# Altium PCB ButtonsBrightnessPCB.PcbDoc
Units mil, origin at the board's own origin, x right, y up, seen from the top; angles counter-clockwise.
Board outline 2515 x 3270 mil, 2 copper layers (Top Layer, Bottom Layer); 50 components, 47 nets, 184 pads, 0 vias.
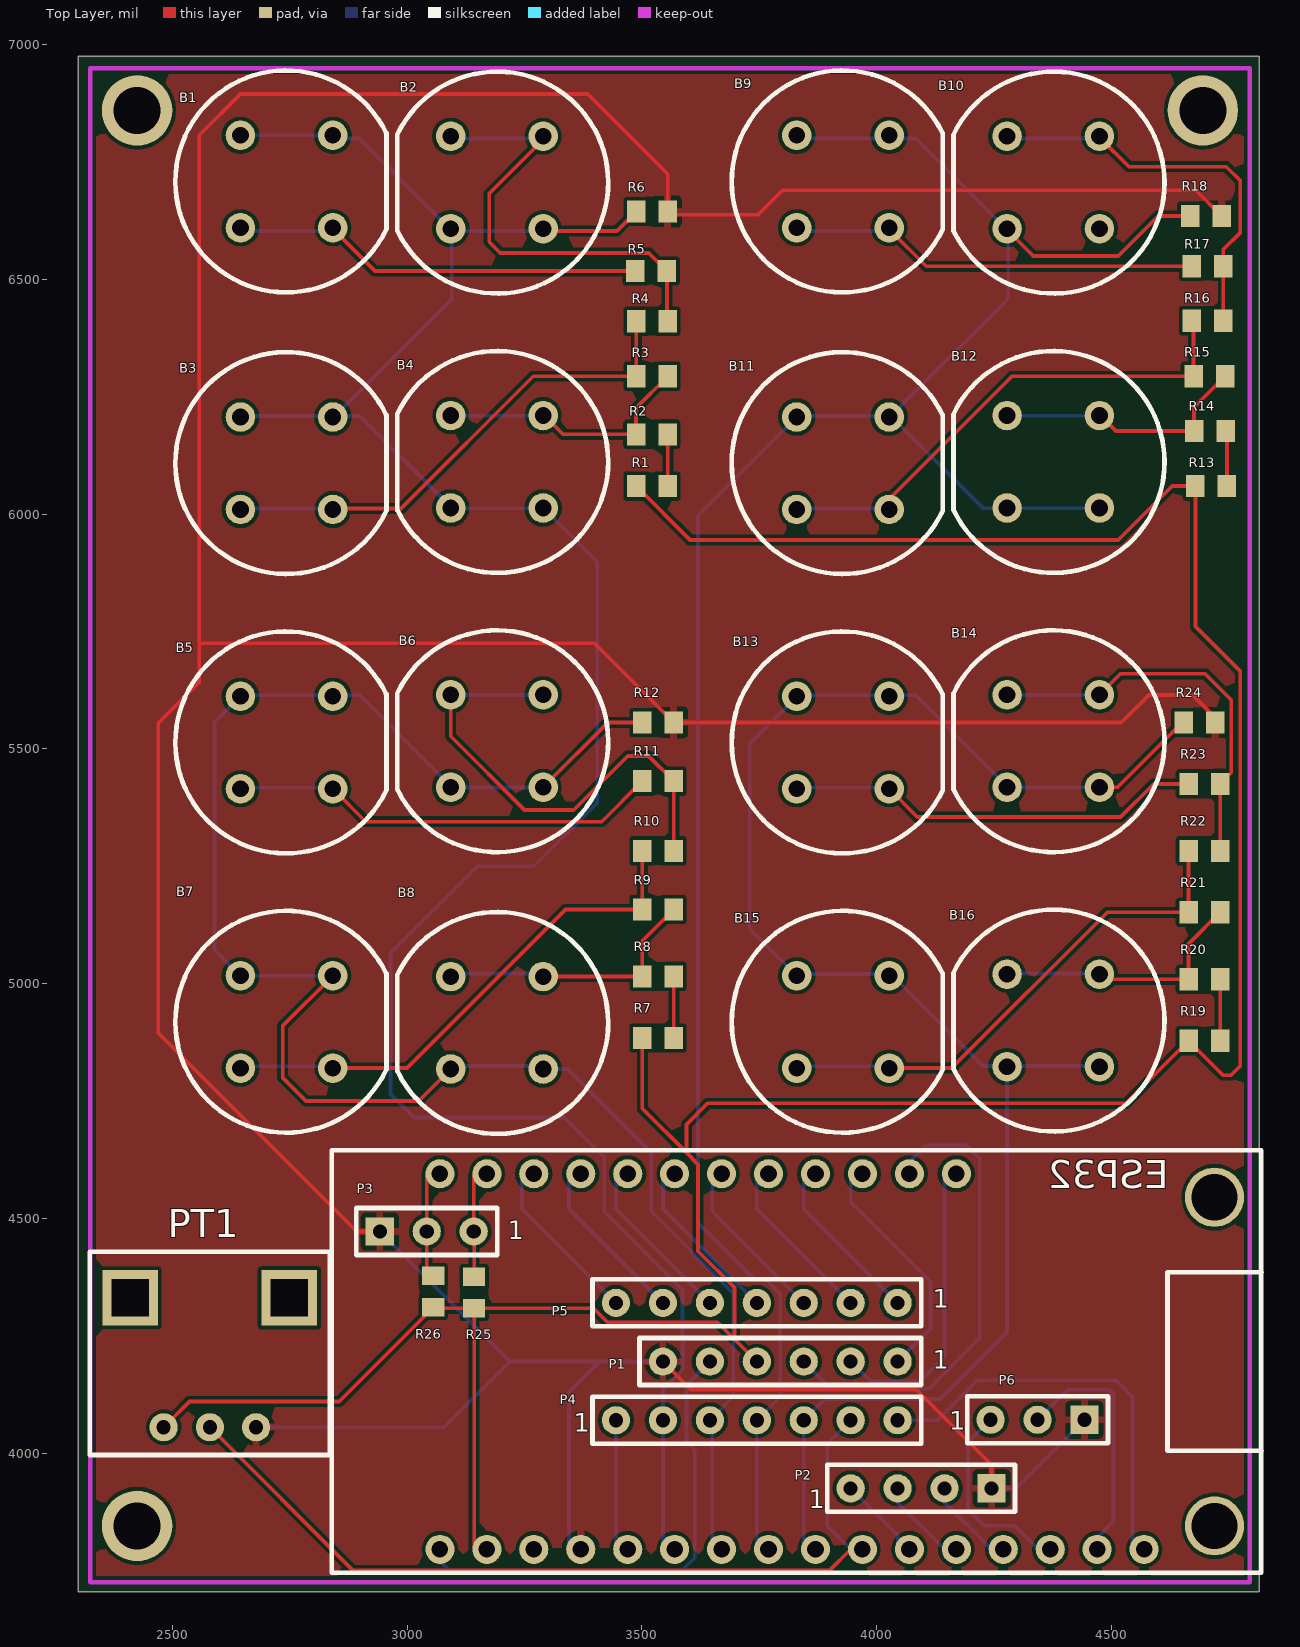
[diagram p0: Top Layer view]
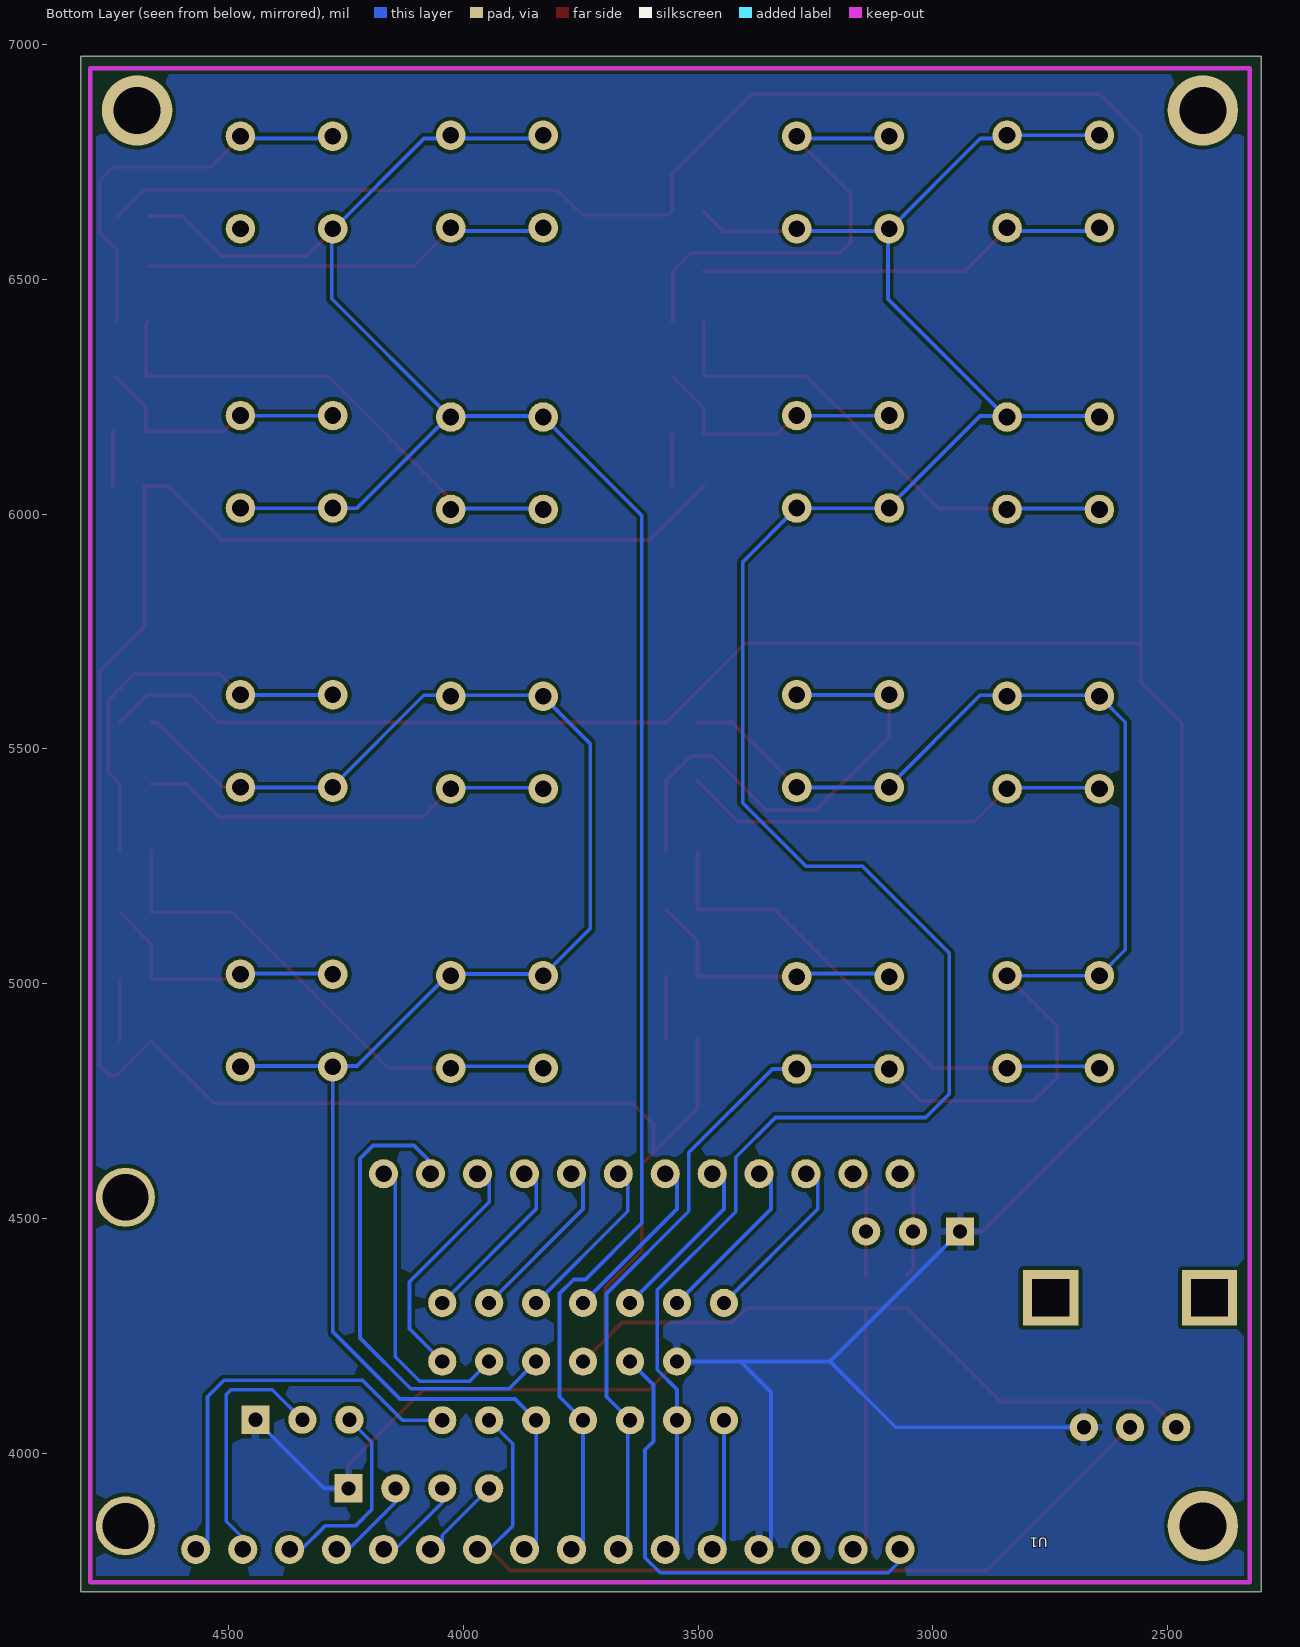
[diagram p1: Bottom Layer view, seen from below]

## Layer stack, top to bottom
Top Solder: solder mask 0.4, Solder Resist, Dk 3.5
Top Layer: signal copper 1.4
Dielectric 1: dielectric 12.6, FR-4, Dk 4.8
Bottom Layer: signal copper 1.4
Bottom Solder: solder mask 0.4, Solder Resist, Dk 3.5

## Board outline
2300,3705 4815,3705 4815,6975 2300,6975

## Design rules (kind name [scope] priority, off if disabled: settings)
Clearance [All] p1: gap=8 ignorepadtopadclearanceinfootprint=FALSE
PolygonConnect PolygonConnect_5 [All vs IsNamedPolygon('Bottom Layer-No Net')] p1: connectstyle=Relief reliefconductorwidth=15 reliefentries=4 polygonreliefangle="90 Angle" airgapwidth=10
PolygonConnect PolygonConnect_4 [All vs IsNamedPolygon('Top Layer-No Net')] p2: connectstyle=Relief reliefconductorwidth=15 reliefentries=4 polygonreliefangle="90 Angle" airgapwidth=10
PolygonConnect PolygonConnect_3 [All vs IsNamedPolygon('Bottom Layer-No Net')] p3: connectstyle=Direct reliefconductorwidth=10 reliefentries=4 polygonreliefangle="90 Angle" airgapwidth=10
PolygonConnect PolygonConnect_2 [All vs IsNamedPolygon('Top Layer-No Net')] p4: connectstyle=Direct reliefconductorwidth=10 reliefentries=4 polygonreliefangle="90 Angle" airgapwidth=10
PolygonConnect PolygonConnect_1 [All vs IsNamedPolygon('Bottom Layer-No Net')] p5: thpad.connectstyle=Direct thpad.reliefconductorwidth=10 thpad.reliefentries=4 thpad.polygonreliefangle="90 Angle" thpad.airgapwidth=10 smdpad.connectstyle=Direct smdpad.reliefconductorwidth=10 smdpad.reliefentries=4 smdpad.polygonreliefangle="90 Angle" smdpad.airgapwidth=10 via.connectstyle=Relief via.reliefconductorwidth=10 via.reliefentries=4 via.polygonreliefangle="90 Angle" via.airgapwidth=10
PolygonConnect [All] p6: connectstyle=Relief reliefconductorwidth=10 reliefentries=4 polygonreliefangle="90 Angle" airgapwidth=10
RoutingVias [All] p1: holewidth=25 width=40 viastyle="Through Hole" minholewidth=28 minwidth=50 maxholewidth=28 maxwidth=50
SolderMaskExpansion [All] p1: expansion=4
Width [All] p1: maxlimit=8 minlimit=8 preferedwidth=8
30 further rules are at their usual default settings.

## Components (designator, comment, footprint, x,y, rotation, side; value= is the part's Value field where it differs from the comment)
B1 "Button_D6R90" BUTTON_D6R90 2840,6610 r180 top
B2 "Button_D6R90" BUTTON_D6R90 3095,6805 r0 top
B3 "Button_D6R90" BUTTON_D6R90 2840,6010 r180 top
B4 "Button_D6R90" BUTTON_D6R90 3095,6210 r0 top
B5 "Button_D6R90" BUTTON_D6R90 2840,5415 r180 top
B6 "Button_D6R90" BUTTON_D6R90 3095,5615 r0 top
B7 "Button_D6R90" BUTTON_D6R90 2840,4820 r180 top
B8 "Button_D6R90" BUTTON_D6R90 3095,5015 r0 top
B9 "Button_D6R90" BUTTON_D6R90 4025,6610 r180 top
B10 "Button_D6R90" BUTTON_D6R90 4280,6805 r0 top
B11 "Button_D6R90" BUTTON_D6R90 4024.88,6010 r180 top
B12 "Button_D6R90" BUTTON_D6R90 4280,6210 r0 top
B13 "Button_D6R90" BUTTON_D6R90 4025,5415 r180 top
B14 "Button_D6R90" BUTTON_D6R90 4280,5615 r0 top
B15 "Button_D6R90" BUTTON_D6R90 4025,4820 r180 top
B16 "Button_D6R90" BUTTON_D6R90 4280,5020 r0 top
P1 "Header 6" CONN_6 4045,4195 r180 top
P2 "Header 4" CONN_4 3945,3925 r0 top
P3 "Header 3" CONN_3 3142,4472 r180 top
P4 "Header 7" CONN_7 3445,4070 r0 top
P5 "Header 7" CONN_7 4045,4320 r180 top
P6 "Header 3" CONN_3 4243,4071 r0 top
PT1 "P090S_pot" P090S_pot 2481.57,4055 r0 top
R1 "ERJ-6GEYJ471V" RES_0804_PANASONIC 3521.81,6056.81 r180 top
R2 "ERJ-6GEYJ471V" RES_0804_PANASONIC 3521.43,6172.95 r0 top
R3 "ERJ-6GEYJ471V" RES_0804_PANASONIC 3521.81,6290.78 r180 top
R4 "ERJ-6GEYJ471V" RES_0804_PANASONIC 3521.81,6413.67 r0 top
R5 "ERJ-6GEYJ471V" RES_0804_PANASONIC 3520,6515 r180 top
R6 "ERJ-6GEYJ471V" RES_0804_PANASONIC 3521.81,6647.64 r0 top
R7 "ERJ-6GEYJ471V" RES_0804_PANASONIC 3534.69,4881.22 r180 top
R8 "ERJ-6GEYJ471V" RES_0804_PANASONIC 3534.69,5018.01 r0 top
R9 "ERJ-6GEYJ471V" RES_0804_PANASONIC 3534.69,5154.8 r180 top
R10 "ERJ-6GEYJ471V" RES_0804_PANASONIC 3534.69,5285.68 r0 top
R11 "ERJ-6GEYJ471V" RES_0804_PANASONIC 3534.69,5428.38 r180 top
R12 "ERJ-6GEYJ471V" RES_0804_PANASONIC 3534.69,5559.26 r0 top
R13 "ERJ-6GEYJ471V" RES_0804_PANASONIC 4712.84,6056.81 r180 top
R14 "ERJ-6GEYJ471V" RES_0804_PANASONIC 4710,6180 r0 top
R15 "ERJ-6GEYJ471V" RES_0804_PANASONIC 4708.91,6290.78 r180 top
R16 "ERJ-6GEYJ471V" RES_0804_PANASONIC 4705,6415 r0 top
R17 "ERJ-6GEYJ471V" RES_0804_PANASONIC 4705,6525 r180 top
R18 "ERJ-6GEYJ471V" RES_0804_PANASONIC 4701.43,6637.95 r0 top
R19 "ERJ-6GEYJ471V" RES_0804_PANASONIC 4698.35,4875.31 r180 top
R20 "ERJ-6GEYJ471V" RES_0804_PANASONIC 4698.35,5012.1 r0 top
R21 "ERJ-6GEYJ471V" RES_0804_PANASONIC 4698.35,5148.89 r180 top
R22 "ERJ-6GEYJ471V" RES_0804_PANASONIC 4698.35,5285.68 r0 top
R23 "ERJ-6GEYJ471V" RES_0804_PANASONIC 4698.35,5422.47 r180 top
R24 "ERJ-6GEYJ471V" RES_0804_PANASONIC 4688.35,5559.26 r0 top
R25 "ERJ-6GEYJ471V" RES_0804_PANASONIC 3140,4342 r90 top
R26 "ERJ-6GEYJ471V" RES_0804_PANASONIC 3053,4344 r90 top
U1 "ESP32_feather" ESP32_FEATHER 4170,4595 r180 bottom

## Footprints (in the part's own frame and the unit in brackets; to place one, negate y for a bottom-side part, rotate by r counter-clockwise, add the part's x,y. Pads: shape width x height; smd on the part's side, far side on the other; paste and mask are expansions set on the pad)
BUTTON_D6R90 [mm]
  round 1.6 hole 0.9: 1(-0.05,0) 2(4.95,0) 3(-0.05,-5) 4(4.95,-5)
  silkscreen extent -2.95,-8.51 8.47,3.49
CONN_3 [mil]
  round 60 hole 30: 1(0,0) 2(100,0)
  rect 60x60 hole 30: 3(200,0)
  silkscreen extent -50,-50 250,50
CONN_4 [mil]
  round 60 hole 30: 1(0,0) 2(100,0) 3(200,0)
  rect 60x60 hole 30: 4(300,0)
  silkscreen extent -50,-50 350,50
CONN_6 [mil]
  round 60 hole 30: 1(0,0) 2(100,0) 3(200,0) 4(300,0) 5(400,0) 6(500,0)
  silkscreen extent -50,-50 550,50
CONN_7 [mil]
  round 60 hole 30: 1(0,0) 2(100,0) 3(200,0) 4(300,0) 5(400,0) 6(500,0) 7(600,0)
  silkscreen extent -50,-50 650,50
ESP32_FEATHER [mil]
  round 62 hole 35.43: 1(0,0) 2(100,0) 3(200,0) 4(300,0) 5(400,0) 6(500,0) 7(600,0) 8(700,0) 9(800,0) 10(900,0) 11(1000,0) 12(1100,0) 13(1100,-800) 14(1000,-800) 15(900,-800) 16(800,-800) 17(700,-800) 18(600,-800) 19(500,-800) 20(400,-800) 21(300,-800) 22(200,-800) 23(100,-800) 24(0,-800) 25(-100,-800) 26(-200,-800) 27(-300,-800) 28(-400,-800)
  round 125.98 hole 98.43: S1(-550,-50) S2(-550,-750)
P090S_pot [mm]
  round 1.524 hole 0.762: 1(0,0) 2(2.5,0) 3(5,0)
  rect 3x3 hole 2 square: 4(-1.8,7) 4(6.8,7)
  silkscreen extent -4,-1.5 9,9.5
RES_0804_PANASONIC [mm]
  rect 1.006x1.2 smd: 1(-0.853,-0.075) 2(0.853,-0.075)

## Part data
P1: "Header, 6-Pin", LatestRevisionDate=17-Jul-2002, LatestRevisionNote="Re-released for DXP Platform.", Publisher="Altium Limited"
P2: "Header, 4-Pin", LatestRevisionDate=17-Jul-2002, LatestRevisionNote="Re-released for DXP Platform.", Publisher="Altium Limited"
P3 P6: "Header, 3-Pin", LatestRevisionDate=17-Jul-2002, LatestRevisionNote="Re-released for DXP Platform.", Publisher="Altium Limited"
P4 P5: "Header, 7-Pin", LatestRevisionDate=17-Jul-2002, LatestRevisionNote="Re-released for DXP Platform.", Publisher="Altium Limited"
R1 R2 R3 R4 R5 R6 R7 R8 R9 R10 R11 R12 R13 R14 R15 R16 R17 R18 R19 R20 R21 R22 R23 R24 R25 R26: Built_By=EMA_UL_Team, C="Copyright (C) 2015 Accelerated Designs. All rights reserved", Manufacturer_Part_Number=ERJ-6GEYJ471V, Vendor=Panasonic

## Free pads (board coordinates)
  round 150 hole 100: 8(2425,3845) 8(2425,6860) 9(4695,6860)

## Nets (pads, with @x,y where several pads share a name; then routed paths per layer and width w, separated by ;. In a path a pad name is that pad's centre, name@x,y a point inside that pad or via, vN(x,y) a via of type N, cw(c..) or ccw(c..) an arc to the next point about the centre after c; other vN are vias at no path point)
3.3V: P1.4 PT1.1 R1.2 R7.2 R13.2 R19.2 R25.1 R26.1 U1.14 | length 6567.2
  Top Layer w8: PT1.1 2536.57,4110 2855.53,4110 R26.1 3057.95,4308.43 R25.1 ; U1.14@3145,3795 3142.95,3797.05 R25.1 ; R1.2 3603,5945 4515,5945 4629.76,6059.76 R13.2 4679.27,5760.73 4775,5665 4775,4825 4755,4805 4738.04,4805 R19.2 4531.5,4745 3640.28,4745 3595,4699.72 3595,4640 ; R7.2 3501.11,4733.89 3595,4640 ; P1.4 3697.5,4242.5 ; R25.1 3397.18,4308.43 3427.6,4278 3662,4278 3697.5,4242.5 ; 3595,4640 3620,4615 3620,4430 3697.5,4352.5 3697.5,4242.5
A0: P4.1 U1.17 | length 275
  Bottom Layer w8: U1.17@3445,3795 P4.1
A1: B1.3 B1.4 B2.3 B2.4 B3.3 B3.4 B4.3 B4.4 P4.2 R6.1 U1.18 | length 5137.5
  Top Layer w8: B2.4@3292.32,6603.35 3446.9,6603.35 R6.1
  Bottom Layer w8: B1.4 B1.3 ; B3.4@2649.61,6208.97 B3.3@2846.46,6208.97 ; B1.3@2846.38,6799.92 2898.9,6799.92 B2.3@3095.47,6603.35 ; B4.4 B4.4@3290.24,6012.8 ; B2.4@3292.32,6603.35 B2.3@3095.47,6603.35 ; U1.18@3545,3795 P4.2 3545,4135.6 3587,4177.6 3587,4347.2 3420,4514.2 3420,4630 3335,4715 3015,4715 2965,4765 2965,5065 3150,5250 3270,5250 3405,5385 3405,5898.03 B4.4@3290.24,6012.8 ; B3.3@2846.46,6208.97 2899.3,6208.97 3095.47,6012.8 B4.4@3290.24,6012.8 ; B3.3@2846.46,6208.97 3095.47,6457.98 B2.3@3095.47,6603.35
A2: B5.3 B5.4 B6.3 B6.4 B7.3 B7.4 B8.3 B8.4 P4.3 R12.1 U1.19 | length 3929.9
  Top Layer w8: B7.3 2735,4909.88 2735,4800 2784.88,4750.12 3025,4750.12 B8.3 ; B6.4 3428.04,5556.31 R12.1
  Bottom Layer w8: B5.4 2590,5556.73 2590,5071.97 B7.4 B7.3 ; B5.4@2649.53,5614.17 2899.3,5614.17 3095.47,5418 B6.4@3292.32,5418 ; B8.3@3095.47,4824.5 B8.4@3292.32,4824.5 ; B8.4 3341.85,4818.15 3520,4640 3520,4515 3695,4340 3695,4120 3650,4075 U1.19@3650,3800
A3: B9.3 B9.4 B10.3 B11.3 B11.4 B12.3 B12.4 P4.4 R18.1 U1.20 | length 4802.6
  Top Layer w8: B10.3@4280.51,6603.35 4333.86,6550 4515,6550 4600,6635 R18.1
  Bottom Layer w8: U1.20@3745,3795 P4.4 3795,4120 3795,4340 3765,4370 3740,4370 3620,4490 3620,5996.85 B11.4 ; B11.4@3833.66,6208.97 B11.3@4030.51,6208.97 ; B9.4@3833.66,6800.2 4083.66,6800.2 4280.51,6603.35 4280.51,6458.97 B11.3@4030.51,6208.97 ; B12.4@4477.36,6012.8 4226.68,6012.8 B11.3@4030.51,6208.97
A4: B13.3 B13.4 B14.3 B14.4 B15.3 B15.4 B16.3 B16.4 P4.5 R24.1 U1.21 | length 3726
  Top Layer w8: B14.4 4513.15,5418.15 4651.31,5556.31 R24.1 R24.1@4664.77,5556.31
  Bottom Layer w8: B15.4 3730,5116.97 3730,5511.73 B13.4 ; B15.4@3833.66,5020.67 4030.51,5020.67 4226.68,4824.5 B16.4@4477.36,4824.5 ; B13.4@3833.66,5614.17 4084.34,5614.17 4280.51,5418 B14.4@4477.36,5418 ; U1.21@3845,3795 P4.5 3890,4115 4135,4115 4278.03,4258.03 B16.3
A5: P4.6 PT1.2 U1.22 | length 1826.4
  Top Layer w8: PT1.2 2885,3750 3900,3750 U1.22@3945,3795
  Bottom Layer w8: U1.22@3945,3795 3895,3845 3895,4020 P4.6
BAT: P1.2 U1.1 | length 628.9
  Bottom Layer w8: P1.2 3987,4153 4093,4153 4145,4205 U1.1@4145,4595
EN: P1.3 U1.2 | length 1037.4
  Bottom Layer w8: P1.3 3903,4137 4112,4137 4220,4245 4220,4627.3 4192.3,4655 4105,4655 U1.2@4045,4595
GND: P1.6 P2.4 P3.3 P6.3 PT1.3 R6.2 R12.2 R18.2 R24.2 U1.16 | length 10143.3
  Top Layer w8: P3.3 2893,4472 2470,4895 2470,5555 2557.28,5642.28 2557.28,5725 ; P1.6 3605,4135 4085,4135 4245,3975 P2.4 ; R24.2@4731.92,5556.31 4673.23,5615 4580.2,5615 4521.51,5556.31 R12.2 3399.57,5725 2557.28,5725 ; R18.2 4680,6690 3800,6690 3747.95,6637.95 3562.12,6637.95 R6.2 3555.39,6724.61 3385,6895 2645,6895 2557.28,6807.28 2557.28,5725
  Bottom Layer w8: PT1.3 3079,4055 3219,4195 ; P3.3 3219,4195 ; U1.16@3345,3795 3345,4130 3410,4195 ; P1.6 3410,4195 ; P2.4 4297,3925 P6.3 ; 3219,4195 3410,4195
IO12: P5.2 U1.5 | length 357.8
  Bottom Layer w8: U1.5@3745,4595 3745,4520 P5.2
IO13: P5.1 U1.4 | length 357.8
  Bottom Layer w8: U1.4@3845,4595 3845,4520 P5.1
IO14: P5.7 U1.10 | length 357.8
  Bottom Layer w8: U1.10@3245,4595 3245,4520 P5.7
IO15: P5.5 U1.8 | length 357.8
  Bottom Layer w8: U1.8@3445,4595 3445,4520 P5.5
IO21: P4.7 U1.28 | length 874.7
  Bottom Layer w8: P4.7 4130,4070 4215,4155 4510,4155 4545,4120 U1.28@4545,3795
IO27: P5.3 U1.6 | length 357.8
  Bottom Layer w8: U1.6@3645,4595 3650,4590 3650,4515 P5.3
IO32: P5.6 U1.9 | length 357.8
  Bottom Layer w8: U1.9@3345,4595 3345,4520 P5.6
IO33: P5.4 U1.7 | length 357.8
  Bottom Layer w8: U1.7@3545,4595 3545,4520 P5.4
MISO: P2.3 U1.25 | length 171.4
  Bottom Layer w8: P2.3 4145,3895 U1.25@4245,3795
MOSI: P2.2 U1.24 | length 171.4
  Bottom Layer w8: P2.2 4045,3895 U1.24@4145,3795
NetB1_1: B1.1 B1.2 R5.2 | length 872.2
  Top Layer w8: B1.1@2846.38,6603.07 2931.5,6517.95 R5.2
  Bottom Layer w8: B1.2@2649.53,6603.07 B1.1@2846.38,6603.07
NetB2_1: B2.1 B2.2 R4.2 R5.1 | length 977.9
  Top Layer w8: B2.2@3292.32,6800.2 3175,6682.87 3175,6580 3198.47,6556.53 3515,6556.53 R5.1 3553.57,6412.53 R4.2
  Bottom Layer w8: B2.1@3095.47,6800.2 B2.2@3292.32,6800.2
NetB3_1: B3.1 B3.2 R3.2 R4.1 | length 1072.3
  Top Layer w8: B3.1@2846.46,6012.12 2987.12,6012.12 3268.73,6293.73 R3.2 R4.1
  Bottom Layer w8: B3.2@2649.61,6012.12 B3.1@2846.46,6012.12
NetB4_1: B4.1 B4.2 R2.1 R3.1 | length 563.2
  Top Layer w8: B4.2@3292.32,6212.37 3292.32,6209.65 3331.97,6170 R2.1 3487.85,6226.2 R3.1
  Bottom Layer w8: B4.1@3095.47,6209.65 B4.2@3292.32,6209.65
NetB5_1: B5.1 B5.2 R11.2 | length 920.7
  Top Layer w8: B5.1 2911.97,5345 3414.78,5345 R11.2
  Bottom Layer w8: B5.2@2649.53,5417.32 B5.1@2846.38,5417.32
NetB6_1: B6.1 B6.2 R10.2 R11.1 | length 1043.6
  Top Layer w8: B6.1 3093.03,5526.97 3250,5370 3355,5370 3470,5485 3514.59,5485 R11.1 R10.2
  Bottom Layer w8: B6.1@3095.47,5614.85 B6.2@3292.32,5614.85
NetB7_1: B7.1 B7.2 R9.2 R10.1 | length 1120.9
  Top Layer w8: B7.1 3000,4820 3337.75,5157.75 R9.2 R10.1
  Bottom Layer w8: B7.2@2649.53,4823.82 B7.1@2846.38,4823.82
NetB8_1: B8.1 B8.2 R8.1 R9.1 | length 578.6
  Top Layer w8: B8.2 3289.94,5015.06 R8.1 3501.11,5090.6 R9.1
  Bottom Layer w8: B8.1@3095.47,5021.35 B8.2@3292.32,5021.35
NetB9_1: B9.1 B9.2 R17.2 | length 869
  Top Layer w8: B9.1@4030.51,6603.35 4105.91,6527.95 R17.2
  Bottom Layer w8: B9.2@3833.66,6603.35 B9.1@4030.51,6603.35
NetB10_1: B10.1 B10.2 R16.2 R17.1 | length 844.9
  Top Layer w8: B10.2@4477.36,6800.2 4537.56,6740 4745,6740 4775,6710 4775,6600 4738.57,6563.57 R17.1 R16.2
  Bottom Layer w8: B10.1@4280.51,6800.2 B10.2@4477.36,6800.2
NetB11_1: B11.1 B11.2 R15.2 R16.1 | length 1092
  Top Layer w8: B11.1@4030.51,6012.12 4030.51,6035.51 4288.73,6293.73 R15.2 4675.33,6408.14 R16.1
  Bottom Layer w8: B11.2@3833.66,6012.12 B11.1@4030.51,6012.12
NetB12_1: B12.1 B12.2 R14.1 R15.1 | length 553.5
  Top Layer w8: B12.2@4477.36,6209.65 4509.96,6177.05 R14.1 4676.43,6227.68 R15.1
  Bottom Layer w8: B12.1@4280.51,6209.65 B12.2@4477.36,6209.65
NetB13_1: B13.1 B13.2 R23.2 | length 888.7
  Top Layer w8: B13.1 4086.97,5355 4520,5355 4590.42,5425.42 R23.2
  Bottom Layer w8: B13.2@3833.66,5417.32 B13.1@4030.51,5417.32
NetB14_1: B14.1 B14.2 R22.2 R23.1 | length 850.8
  Top Layer w8: B14.2 4519.88,5660 4700,5660 4755.72,5604.28 4755.72,5449.22 R23.1 R22.2
  Bottom Layer w8: B14.1@4280.51,5614.85 B14.2@4477.36,5614.85
NetB15_1: B15.1 B15.2 R21.2 R22.1 | length 1103
  Top Layer w8: B15.1 4160,4820 4491.85,5151.85 R21.2 R22.1
  Bottom Layer w8: B15.2@3833.66,4823.82 B15.1@4030.51,4823.82
NetB16_1: B16.1 B16.2 R20.1 R21.1 | length 561.7
  Top Layer w8: B16.2 4485.73,5009.15 R20.1 4664.77,5084.7 R21.1
  Bottom Layer w8: B16.1@4280.51,5021.35 B16.2@4477.36,5021.35
NetR1_1: R1.1 R2.2 | length 110.4
  Top Layer w8: R2.2 3555.39,6169.61 R1.1
NetR7_1: R7.1 R8.2 | length 130.9
  Top Layer w8: R7.1 R8.2
NetR13_1: R13.1 R14.2 | length 118.5
  Top Layer w8: R14.2 4746.42,6174.2 R13.1
NetR19_1: R19.1 R20.2 | length 130.9
  Top Layer w8: R19.1 R20.2
RST: P1.5 U1.13 | length 1048
  Bottom Layer w8: U1.13@3045,3795 3095,3745 3580.81,3745 3613,3777.19 3613,4007 3595,4025 3595,4145 P1.5
RX: P6.1 U1.26 | length 396.1
  Bottom Layer w8: P6.1 4195,4023 4195,3880 4230,3845 4295,3845 U1.26@4345,3795
SCK: P2.1 U1.23 | length 171.4
  Bottom Layer w8: P2.1 4045,3825 U1.23@4045,3795
SCL: P3.1 R25.2 U1.11 | length 221.1
  Top Layer w8: R25.2 3142.95,4471.05 P3.1 3142,4592 U1.11@3145,4595
SDA: P3.2 R26.2 U1.12 | length 224.4
  Top Layer w8: U1.12@3045,4595 3042,4592 P3.2 3042,4391.53 R26.2
TX: P6.2 U1.27 | length 547.5
  Bottom Layer w8: P6.2 4407,4135 4495,4135 4505,4125 4505,3855 U1.27@4445,3795
USB: P1.1 U1.3 | length 499.4
  Bottom Layer w8: U1.3@3945,4595 3945,4535 4115,4365 4115,4265 P1.1
pads on no net: B10.4 PT1.4 U1.15 U1.S1 U1.S2

## Polygon pours and split planes (outlines as drawn)
GND on Top Layer "Top Layer-No Net" (solid, remove dead copper, pour order 2): 2325,6950 4795,6950 4795,3725 2325,3725
GND on Bottom Layer "Bottom Layer-No Net" (solid, remove dead copper, pour order 4): 2325,6950 4795,6950 4795,3725 2325,3725

## Keep-outs
Keep-Out Layer:
  lines w10: 2325,3725 4795,3725 4795,6950 2325,6950 2325,3725

## Silkscreen, mask and mechanical layers (free items; w line width, h text height)
Mechanical 1:
  lines w10: 2300,3705 4820,3705 4820,6975 2300,6975 2300,3705

## Text inside footprints (layer, text, board x,y; h text height)
P1: Top Overlay "1" at 4120,4180 h40
P2: Top Overlay "1" at 3856,3882 h40
P3: Top Overlay "1" at 3215,4455 h40
P4: Top Overlay "1" at 3355,4045 h40
P5: Top Overlay "1" at 4120,4310 h40
P6: Top Overlay "1" at 4155,4050 h40
U1: Top Overlay "ESP32" at 4622.76,4564.49 h60